# EAGLE board robo-tito1 (EAGLE 7.5.0)

Size 100 x 80 mm. Coordinates in mm from the lower left corner, seen from the top.
Outline: 0,0 100,0 100,80 0,80 0,0
Copper layers (1*16): Top 0.035mm / dielectric 1.5mm / Bottom 0.035mm
Design rules "default": minimum track width 10mil, minimum drill 24mil, track to track 8mil, track to pad 8mil, pad to pad 8mil, via to via 8mil, smd to smd 8mil, copper to edge 40mil, drill to drill 8mil, minimum pad ring 10mil, minimum via ring 8mil, stop-mask expansion 4mil, vias tented up to drill 0mil, thermal gap 10mil

## Footprints (pad centres in the part's own frame; a part is rotated, then mirrored left to right if it is on the bottom)
EB20D = drill 2.007 pad 4.597: + -5.08,0 | drill 2.007 pad 4.597 octagon: - 5.08,0
DIL16 = drill 0.813 long: 1 -8.89,-3.81; 2 -6.35,-3.81; 3 -3.81,-3.81; 4 -1.27,-3.81; 5 1.27,-3.81; 6 3.81,-3.81; 7 6.35,-3.81; 8 8.89,-3.81; 9 8.89,3.81; 10 6.35,3.81; 11 3.81,3.81; 12 1.27,3.81; 13 -1.27,3.81; 14 -3.81,3.81; 15 -6.35,3.81; 16 -8.89,3.81
JST-2-PTH-NS = drill 0.7 pad 1.6: 1 -1,0; 2 1,0
1X03 = drill 1.016: 1 -2.54,0; 2 0,0; 3 2.54,0
LED3MM = drill 0.813 octagon: A -1.27,0; K 1.27,0
PHOTOCELL = drill 0.8 pad 1.676: 1 -2,0; 2 2,0
0207/12 = drill 0.813 pad 1.676 octagon: 1 -6.35,0; 2 6.35,0
SWITCHE-DPDT = drill 0.7 pad 1.676: 1 -4,1.25; 2 0,1.25; 3 4,1.25; 4 -4,-1.25; 5 0,-1.25; 6 4,-1.25 | drill 1.5 pad 2.54: P$1 -7.5,3; P$2 -7.5,-3; P$3 7.5,3; P$4 7.5,-3
4 = drill 0.61 pad 1.27: A -1.27,1.27; C 1.27,-1.27; E 1.27,1.27; K -1.27,-1.27
PNA460XM = drill 1.016 pad 1.93 square: 1 -2.54,0 | drill 1.016 pad 1.93: 2 0,0; 3 2.54,0
PDIP-32 = drill 0.8 pad 1.778: 3V3 15.24,-35.56; +5V 15.24,-10.16; A0 15.24,-12.7; A1 15.24,-15.24; A2 15.24,-17.78; A3 15.24,-20.32; A4 15.24,-22.86; A5 15.24,-25.4; A6 15.24,-27.94; A7 15.24,-30.48; AREF 15.24,-33.02; D0/RX 0,-5.08; D2 0,-12.7; D3 0,-15.24; D4 0,-17.78; D5 0,-20.32; D6 0,-22.86; D7 0,-25.4; D8 0,-27.94; D9 0,-30.48; D10 0,-33.02; D11 0,-35.56; D12 0,-38.1; D13 15.24,-38.1; GND 0,-10.16; GND1 15.24,-5.08; RESET 0,-7.62; RESET1 15.24,-7.62; VIN 15.24,-2.54 | drill 0.8 pad 1.778 square: D1/TX 0,-2.54 | hole 1.778: 0,0; 0,-40.64; 15.24,-40.64; 15.24,0
VIBE-MOTOR-10MM = drill 0.8 pad 1.676: + -5,-3.9; - -6.35,-2.54
1X04-BIG = drill 1.016 pad 1.778: 1 0,0; 2 2.54,0; 3 5.08,0; 4 7.62,0

## Placement (x,y rotation side)
C1  [EB20D]  29.21,43.18 0 top
IC1  L293D  [DIL16]  93.98,66.04 90 top
J1  [JST-2-PTH-NS]  10.16,44.45 0 top
JP1  [1X03]  5.08,67.31 0 top
JP2  [1X03]  17.78,74.93 0 top
JP3  [1X03]  29.21,76.2 0 top
JP4  [1X03]  7.62,74.93 0 top
LED1  TLLG4400  [LED3MM]  96.52,24.13 0 top
LED2  TLLR4400  [LED3MM]  96.52,17.78 0 top
LED3  TLLY4400  [LED3MM]  95.25,12.7 0 top
R1  PHOTOCELLPTH  [PHOTOCELL]  77.47,76.2 0 top
R3  PHOTOCELLPTH  [PHOTOCELL]  81.28,3.81 0 top
R4  [0207/12]  11.43,5.08 0 top
R5  [0207/12]  11.43,10.16 0 top
R6  [0207/12]  11.43,17.78 0 top
R7  [0207/12]  11.43,22.86 0 top
R8  [0207/12]  11.43,20.32 0 top
R9  [0207/12]  11.43,2.54 180 top
R10  [0207/12]  11.43,12.7 180 top
R11  [0207/12]  11.43,15.24 0 top
R12  [0207/12]  11.43,7.62 0 top
S1  [SWITCHE-DPDT]  60.96,64.77 0 top
U$1  CNY70  [4]  63.5,43.18 0 top
U$2  CNY70  [4]  20.32,64.77 0 top
U$3  PNA460XM  [PNA460XM]  96.52,5.08 90 top
U$4  ARDUINONANO  [PDIP-32]  -96.52,45.72 0 top  (outside the outline)
U$5  LIPO-OUTLINE2000  [LIPO-2000]  -76.2,1.27 0 top  (outside the outline)
U$6  MOTOR10MM  [VIBE-MOTOR-10MM]  45.72,71.12 0 top
U$7  MOTOR10MM  [VIBE-MOTOR-10MM]  53.34,11.43 0 top
ULTRA1  1X4-BIG  [1X04-BIG]  97.79,31.75 90 top

## Library data of the parts
C1 JP1-JP4 R4-R12 U$3 ULTRA1 = adafruit
IC1 = st-microelectronics; MPN: L293D; OC_FARNELL: 9589619; OC_NEWARK: 56P8249
J1 = SparkFun-Connectors
LED1 = led; MF: VISHAY SEMICONDUCTOR; OC_FARNELL: 1612435
LED2 = led; MF: VISHAY SEMICONDUCTOR; OC_FARNELL: 1612437
LED3 = led; MF: VISHAY SEMICONDUCTOR; OC_FARNELL: 1612439
R1 R3 = SparkFun-Sensors
S1 U$5-U$7 = SparkFun-Electromechanical
U$1 U$2 = cny70
U$4 = jet-lib

## Nets
GND: IC1.4 IC1.5 IC1.12 IC1.13 LED1.K LED2.K LED3.K R3.2 U$1.E U$1.K U$2.A U$2.E U$3.2 ULTRA1.1
N$1: LED1.A R4.1
N$2: LED2.A R5.1
N$3: LED3.A R6.1
N$4: U$4.D7
N$5: U$4.D8
N$6: IC1.15 U$4.D9
N$7: IC1.10 U$4.D10
N$8: IC1.1 U$4.D5
N$9: IC1.9 U$4.D6
N$10: IC1.3 U$6.+
N$11: IC1.6 U$6.-
N$12: IC1.14 U$7.-
N$13: IC1.11 U$7.+
N$14: R4.2 U$4.D11
N$15: R5.2 U$4.D12
N$16: U$4.D13
N$17: R7.2 U$1.C U$4.A0
N$18: R10.2 U$2.C U$4.A2
N$19: R11.1 U$2.K
N$21: U$4.A3
N$22: R8.1 U$1.A
N$23: R11.2
N$24: R1.1 R9.2 U$4.A4
N$25: R3.1 R12.2 U$4.A5
N$26: R1.2
N$27: U$4.D2 ULTRA1.2
N$28: U$4.D3 ULTRA1.3
VCC: R7.1 R8.2 R9.1 R10.1 R12.1 U$3.3 ULTRA1.4
VCC1: IC1.16
VCC2: IC1.8

## Tracks (layer width: path | path; a pad name or v marks a point on that pad's centre or on a via)
GND  (13 unrouted)
N$1  (1 unrouted)
N$2  (1 unrouted)
N$3  (1 unrouted)
N$6  (1 unrouted)
N$7  (1 unrouted)
N$8  (1 unrouted)
N$9  (1 unrouted)
N$10  (1 unrouted)
N$11  (1 unrouted)
N$12  (1 unrouted)
N$13  (1 unrouted)
N$14  (1 unrouted)
N$15  (1 unrouted)
N$17  (2 unrouted)
N$18  (2 unrouted)
N$19  (1 unrouted)
N$22  (1 unrouted)
N$24  (2 unrouted)
N$25  (2 unrouted)
N$27  (1 unrouted)
N$28  (1 unrouted)
VCC  (6 unrouted)